# EAGLE board WeighingControl_Karbra_Silkscreen (EAGLE 9.6.2)
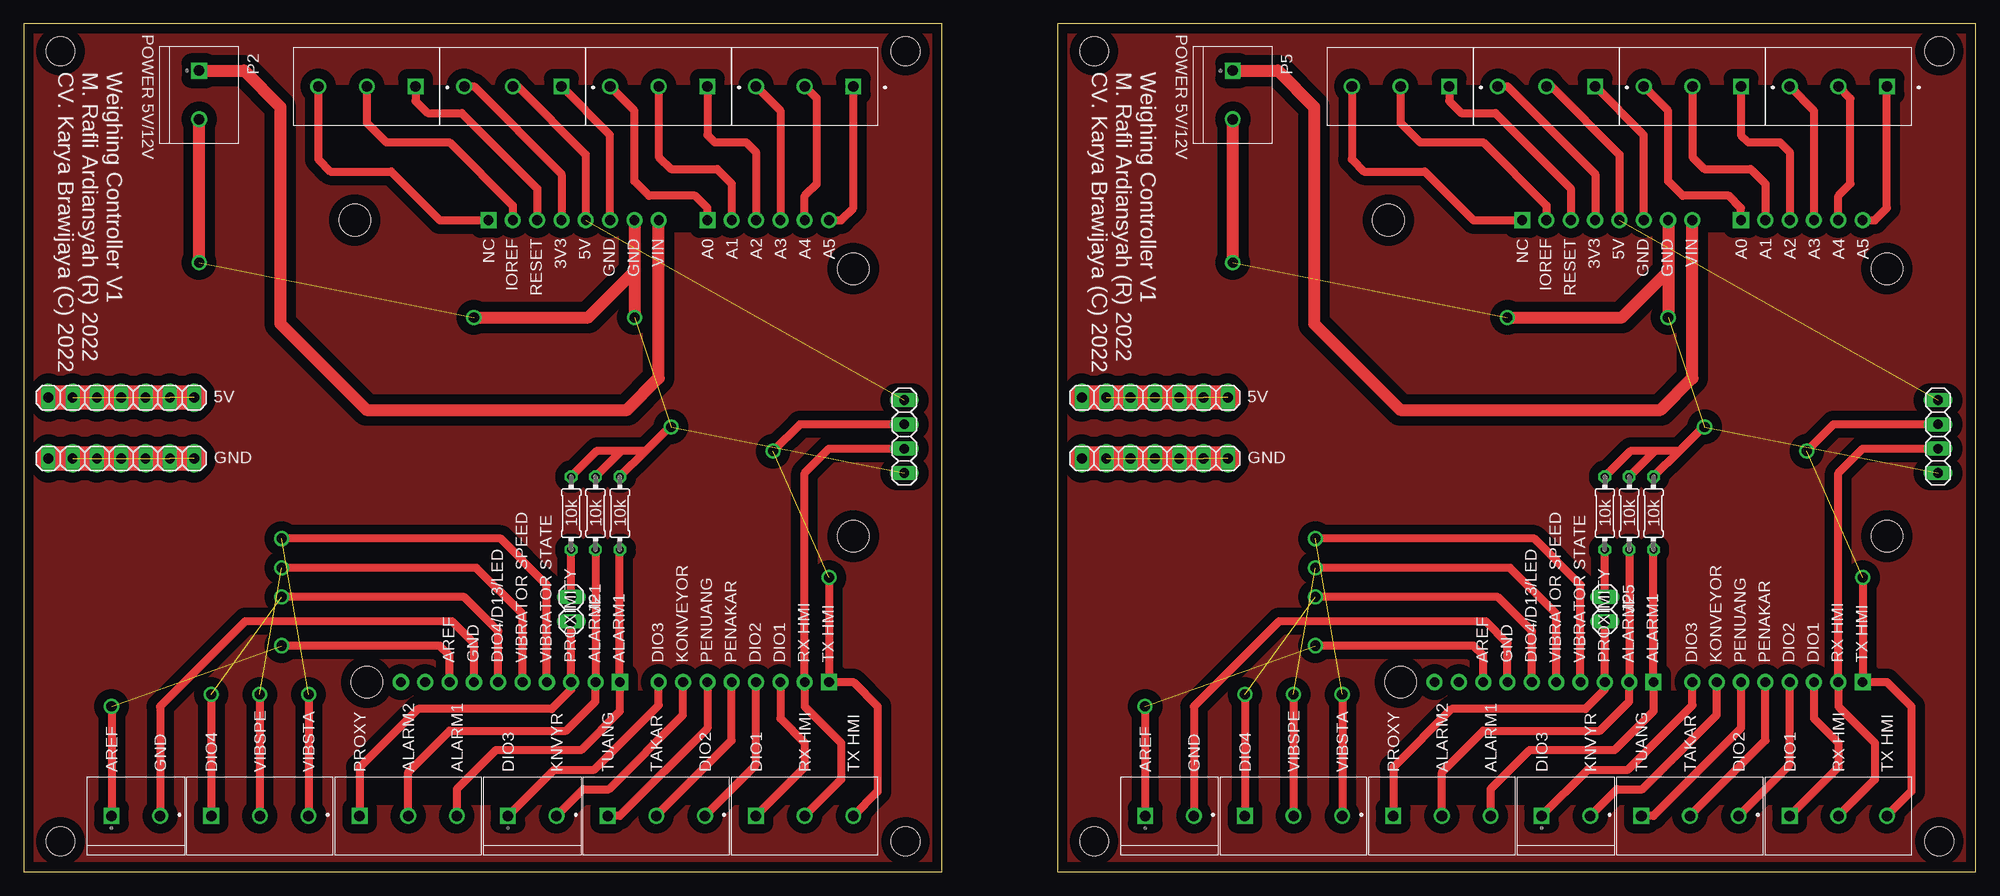
[diagram p0: board, top side]

Size 203.81 x 88.57 mm. Coordinates in mm from the lower left corner, seen from the top.
Outline: 0,0 95.86,0 95.86,88.57 0,88.57 0,0
Outline: 107.95,0 203.81,0 203.81,88.57 107.95,88.57 107.95,0
Copper layers (1*16): Top 0.035mm / dielectric 1.5mm / Bottom 0.035mm
Design rules "default *": minimum track width 6mil, minimum drill 0.35mm, track to track 1mm, track to pad 0.7mm, pad to pad 0.7mm, via to via 0.7mm, smd to smd 0.7mm, copper to edge 40mil, drill to drill 6mil, minimum pad ring 10mil, minimum via ring 8mil, stop-mask expansion 4mil, vias tented up to drill 0mil, thermal gap 10mil
Holes 3 mm at 3.81,3.17 3.81,85.72 92.08,3.17 92.08,85.72 111.76,3.17 111.76,85.72 200.03,3.17 200.03,85.72

## Footprints (pad centres in the part's own frame; a part is rotated, then mirrored left to right if it is on the bottom)
ARDUINO_A000066 = drill 1.016 pad 1.676: 3V3 35.56,2.54; 5V 38.1,2.54; A1 53.34,2.54; A2 55.88,2.54; A3 58.42,2.54; A4 60.96,2.54; A4(SDA) 21.336,50.8; A5 63.5,2.54; A5(SCL) 18.796,50.8; AREF 23.876,50.8; D1 60.96,50.8; D2 58.42,50.8; D3 55.88,50.8; D4 53.34,50.8; D5 50.8,50.8; D6 48.26,50.8; D7 45.72,50.8; D9 39.116,50.8; D10 36.576,50.8; D11 34.036,50.8; D12 31.496,50.8; D13 28.956,50.8; GND_1 43.18,2.54; GND_2 40.64,2.54; GND_3 26.416,50.8; IOREF 30.48,2.54; RST 33.02,2.54; VIN 45.72,2.54 | drill 1.016 pad 1.676 square: A0 50.8,2.54; D0 63.5,50.8; D8 41.656,50.8; P1 27.94,2.54 | hole 3.3: 66.04,35.56; 66.04,7.62; 15.24,50.8; 13.97,2.54
TE_282837-3 = drill 1.1 square: 1 -5.08,0 | drill 1.1: 2 0,0; 3 5.08,0
1X02 = drill 1.016 long: 1 -1.27,0; 2 1.27,0
1X04 = drill 1.016 long: 1 -3.81,0; 2 -1.27,0; 3 1.27,0; 4 3.81,0
1X07 = drill 1.016 long: 1 -7.62,0; 2 -5.08,0; 3 -2.54,0; 4 0,0; 5 2.54,0; 6 5.08,0; 7 7.62,0
TE_282837-2 = drill 1.1 square: 1 -2.54,0 | drill 1.1: 2 2.54,0
0204/7 = drill 0.813 octagon: 1 -3.81,0; 2 3.81,0

## Placement (x,y rotation side)
A1  A000066  [ARDUINO_A000066]  20.57,70.61 180 bottom
A2  A000066  [ARDUINO_A000066]  128.52,70.61 180 bottom
J1  282837-3  [TE_282837-3]  81.53,5.84 0 top
J2  282837-3  [TE_282837-3]  66.04,5.84 0 top
J3  282837-3  [TE_282837-3]  66.29,82.04 180 top
J4  282837-3  [TE_282837-3]  81.53,82.04 180 top
J5  282837-3  [TE_282837-3]  35.81,82.04 180 top
J6  282837-3  [TE_282837-3]  51.05,82.04 180 top
J7  282837-3  [TE_282837-3]  40.13,5.84 0 top
J8  282837-3  [TE_282837-3]  24.64,5.84 0 top
J9  282837-3  [TE_282837-3]  189.48,5.84 0 top
J10  282837-3  [TE_282837-3]  173.99,5.84 0 top
J11  282837-3  [TE_282837-3]  174.24,82.04 180 top
J12  282837-3  [TE_282837-3]  189.48,82.04 180 top
J13  282837-3  [TE_282837-3]  143.76,82.04 180 top
J14  282837-3  [TE_282837-3]  159,82.04 180 top
J15  282837-3  [TE_282837-3]  148.08,5.84 0 top
J16  282837-3  [TE_282837-3]  132.59,5.84 0 top
JP1  [1X02]  57.15,27.43 270 top
JP2  [1X04]  91.95,45.47 270 top
JP3  [1X07]  10.16,49.53 0 top
JP4  [1X07]  10.16,43.18 0 top
JP5  [1X02]  165.1,27.43 270 top
JP6  [1X04]  199.9,45.47 270 top
JP7  [1X07]  118.11,49.53 0 top
JP8  [1X07]  118.11,43.18 0 top
P1  282837-2  [TE_282837-2]  53.09,5.84 0 top
P2  282837-2  [TE_282837-2]  18.29,81.15 270 top
P3  282837-2  [TE_282837-2]  11.68,5.84 0 top
P4  282837-2  [TE_282837-2]  161.04,5.84 0 top
P5  282837-2  [TE_282837-2]  126.24,81.15 270 top
P6  282837-2  [TE_282837-2]  119.63,5.84 0 top
R1  [0204/7]  57.15,37.47 90 top
R2  [0204/7]  59.69,37.47 90 top
R3  [0204/7]  62.23,37.47 90 top
R4  [0204/7]  165.1,37.47 90 top
R5  [0204/7]  167.64,37.47 90 top
R6  [0204/7]  170.18,37.47 90 top

## Library data of the parts
A1 A2 = A000066; DESCRIPTION: A000066 | Arduino Uno Rev3 Arduino Corporation Embedded System Development Boards & Kits Microcontroller 16MHz - Arrow.com; DIGI-KEY_PART_NUMBER: 1050-1024-ND; MF: Arduino; MP: A000066; PACKAGE: Non-Standard Arduino; PURCHASE-URL: https://pricing.snapeda.com/search/part/A000066/?ref=eda
J1-J16 = 282837-3; AVAILABILITY: In Stock; COMMENT: 282837-3; DESCRIPTION: Wire to Board 3 Position 5.08 mm Pitch 30-16 AWG Euro Style Terminal Block; MF: TE Connectivity; MP: 282837-3; PACKAGE: None; PRICE: None; PURCHASE-URL: https://pricing.snapeda.com/search/part/282837-3/?ref=eda
JP1-JP8 = pinhead
P1-P6 = 282837-2; AVAILABILITY: In Stock; COMMENT: 282837-2; DESCRIPTION: Connector Terminal Blocks Receptacle 2 Position 5.08mm Solder Straight Thru-Hole 13.5A/Contact; EU_ROHS_COMPLIANCE: Compliant with Exemptions; MF: TE Connectivity; MP: 282837-2; PACKAGE: None; PRICE: None; PURCHASE-URL: https://pricing.snapeda.com/search/part/282837-2/?ref=eda
R1-R6 = rcl; SPICEPREFIX: R

## Nets
N$1: A1.A0 J3.3
N$2: A1.A1 J3.2
N$3: A1.A2 J3.1
N$4: A1.A3 J4.3
N$5: A1.A4 J4.2
N$6: A1.A5 J4.1
N$7: A1.D0 J1.3 JP2.2
N$8: A1.D1 J1.2 JP2.3
N$9: A1.D2 J1.1
N$10: A1.D3 J2.3
N$11: A1.D4 J2.2
N$12: A1.D5 J2.1
N$13: A1.D6 P1.2
N$14: A1.D7 P1.1
N$15: A1.P1 J5.3
N$16: A1.IOREF J5.2
N$17: A1.RST J5.1
N$18: A1.3V3 J6.3
N$19: A1.5V J6.2 JP2.1
N$20: A1.GND_1 JP2.4 P2.2 R1.2 R2.2 R3.2
N$21: A1.GND_2 J6.1
N$22: A1.VIN P2.1
N$23: A1.D8 J7.3 R3.1
N$24: A1.D9 J7.2 R2.1
N$25: JP1.1 R1.1
N$26: A1.D11 J8.3
N$27: A1.D12 J8.2
N$28: A1.D13 J8.1
N$29: A1.GND_3 P3.2
N$30: A1.AREF P3.1
N$31: JP3.1 JP3.2 JP3.3 JP3.4 JP3.5 JP3.6 JP3.7
N$32: JP4.1 JP4.2 JP4.3 JP4.4 JP4.5 JP4.6 JP4.7
N$33: A2.A0 J11.3
N$34: A1.D10 J7.1 JP1.2
N$35: A2.A1 J11.2
N$36: A2.A2 J11.1
N$37: A2.A3 J12.3
N$38: A2.A4 J12.2
N$39: A2.A5 J12.1
N$40: A2.D0 J9.3 JP6.2
N$41: A2.D1 J9.2 JP6.3
N$42: A2.D2 J9.1
N$43: A2.D3 J10.3
N$44: A2.D4 J10.2
N$45: A2.D5 J10.1
N$46: A2.D6 P4.2
N$47: A2.D7 P4.1
N$48: A2.P1 J13.3
N$49: A2.IOREF J13.2
N$50: A2.RST J13.1
N$51: A2.3V3 J14.3
N$52: A2.5V J14.2 JP6.1
N$53: A2.VIN P5.1
N$54: A2.D8 J15.3 R6.1
N$55: A2.D9 J15.2 R5.1
N$56: A2.D11 J16.3
N$57: A2.D12 J16.2
N$58: A2.D13 J16.1
N$59: A2.GND_3 P6.2
N$60: A2.AREF P6.1
N$61: A2.GND_1 JP6.4 P5.2 R4.2 R5.2 R6.2
N$62: A2.GND_2 J14.1
N$63: A2.D10 J15.1 JP5.2
N$64: JP5.1 R4.1
N$65: JP7.1 JP7.2 JP7.3 JP7.4 JP7.5 JP7.6 JP7.7
N$66: JP8.1 JP8.2 JP8.3 JP8.4 JP8.5 JP8.6 JP8.7

## Tracks (layer width: path | path; a pad name or v marks a point on that pad's centre or on a via)
KEEP0
  cutout Top: 26.92,34.67 49.91,34.67 54.61,29.97 54.61,23.11 54.48,22.99 26.92,22.99
KEEP1
  cutout Top: 35.05,7.11 87.25,7.11 89.03,8.89 89.03,17.02 87.25,18.8 42.8,18.8 36.32,12.32 35.05,11.05
KEEP2
  cutout Top: 86.61,82.04 30.73,82.04 30.73,74.55 32.13,73.15 38.23,73.15 44.45,66.93 83.06,66.93 86.61,70.48
KEEP3
  cutout Top: 134.87,34.67 157.86,34.67 162.56,29.97 162.56,23.11 162.43,22.99 134.87,22.99
KEEP4
  cutout Top: 143,7.11 195.2,7.11 196.98,8.89 196.98,17.02 195.2,18.8 150.75,18.8 144.27,12.32 143,11.05
KEEP5
  cutout Top: 194.56,82.04 138.68,82.04 138.68,74.55 140.08,73.15 146.18,73.15 152.4,66.93 191.01,66.93 194.56,70.48
MASKING_ATAS
  pour Top (isolate 1): 0,88.52 95.89,88.52 95.89,87.25 95.89,0 93.73,0 0,0 0,2.16
MASKING_ATAS1
  pour Top (isolate 1): 107.95,88.52 203.84,88.52 203.84,87.25 203.84,0 201.68,0 107.95,0 107.95,2.16
N$1
  Top 0.813: J3.3 63.75,79.5 63.75,72.14 65.28,70.61 70.1,70.61 71.37,69.34 A1.A0
N$2
  Top 0.813: J3.2 66.29,74.68 67.56,73.41 72.39,73.41 73.91,71.88 A1.A1
N$3
  Top 0.61: A1.A2 76.45,74.42
  Top 0.813: J3.1 71.37,76.96 72.14,76.2 75.44,76.2 76.45,75.18 A1.A2
N$4
  Top 0.813: J4.3 78.99,79.5 A1.A3
N$5
  Top 0.813: J4.2 82.8,80.77 82.8,71.88 81.53,70.61 A1.A4
N$6
  Top 0.813: A1.A5 85.34,68.07 86.61,69.34 J4.1
N$7  (via drill 1.05 pad 0.75)  (1 unrouted)
  Top 0.813: J1.3 89.15,8.38 89.15,17.27 86.61,19.81 A1.D0 v84.07,30.73 | JP2.2 81.03,46.74 v78.23,43.94
N$8
  Top 0.813: J1.2 85.34,9.65 85.34,13.46 81.53,17.27 A1.D1 81.53,41.66 84.07,44.2 JP2.3
N$9
  Top 0.813: J1.1 81.53,10.92 81.53,13.46 78.99,16 A1.D2
N$10
  Top 0.813: J2.3 76.45,11.18 A1.D3
N$11
  Top 0.813: A1.D4 73.91,13.72 J2.2
N$12
  Top 0.813: A1.D5 71.37,14.99 62.23,5.84 J2.1
N$13
  Top 0.813: P1.2 58.42,8.64 61.09,8.64 68.83,16.38 A1.D6
N$14
  Top 0.813: P1.1 55.37,10.67 59.56,10.67 66.29,17.4 A1.D7
N$15
  Top 0.813: J5.3 30.73,74.42 32,73.15 38.35,73.15 43.43,68.07 A1.P1
N$16
  Top 0.813: J5.2 35.81,78.23 37.85,76.2 44.45,76.2 51.05,69.6 A1.IOREF
N$17
  Top 0.813: J5.1 40.89,80.52 42.16,79.25 45.72,79.25 53.59,71.37 A1.RST
N$18
  Top 0.813: J6.3 46.99,82.04 56.13,72.9 A1.3V3
N$19  (1 unrouted)
  Top 0.813: J6.2 51.56,82.04 58.67,74.93 A1.5V
N$20  (via drill 1.05 pad 0.75)  (3 unrouted)
  Top 0.813: R3.2 64.96,44.01 | 64.96,44.01 67.44,46.48 v67.56,46.48 | 62.42,44.01 59.88,44.01 R1.2 | 62.42,44.01 64.96,44.01 | R2.2 62.42,44.01
  Top 1.27: A1.GND_1 63.75,62.74 | 63.75,62.74 v63.75,57.91 | 63.75,62.74 58.93,57.91 v46.99,57.91 | v18.29,63.63 P2.2
N$21
  Top 0.813: J6.1 61.21,76.96 A1.GND_2
N$22
  Top 1.27: A1.VIN 66.29,51.56 62.99,48.26 35.79,48.26 26.78,57.26 26.78,79.9 22.99,83.69 P2.1
N$23
  Top 0.813: R3.1 A1.D8 62.23,16.76 58.17,12.7 49.28,12.7 45.21,8.64 J7.3
N$24
  Top 0.813: R2.1 A1.D9 59.69,17.78 56.64,14.73 44.45,14.73 40.13,10.41 J7.2
N$25
  Top 0.813: JP1.1 R1.1
N$26  (via drill 1.05 pad 0.75)  (1 unrouted)
  Top 0.813: v29.72,18.54 J8.3 | A1.D11 54.61,29.97 49.78,34.8 v26.92,34.8
N$27  (via drill 1.05 pad 0.75)  (1 unrouted)
  Top 0.813: v24.64,18.54 J8.2 | A1.D12 52.07,26.92 47.24,31.75 v26.92,31.75
N$28  (via drill 1.05 pad 0.75)  (1 unrouted)
  Top 0.813: A1.D13 49.53,25.15 45.97,28.7 v26.92,28.7 | v19.56,18.54 J8.1
N$29
  Top 0.813: A1.GND_3 46.99,23.88 44.7,26.16 23.11,26.16 14.22,17.27 P3.2
N$30  (via drill 1.05 pad 0.75)  (1 unrouted)
  Top 0.813: A1.AREF 44.45,22.61 43.43,23.62 v26.92,23.62 | v9.14,17.27 P3.1
N$31  (5 unrouted)
  Top 2.54: JP3.1 JP3.7
N$32  (5 unrouted)
  Top 2.54: JP4.1 JP4.7
N$33
  Top 0.813: J11.3 171.7,79.5 171.7,72.14 173.23,70.61 178.05,70.61 179.32,69.34 A2.A0
N$34
  Top 0.813: J7.1 35.05,10.92 41.15,17.02 55.12,17.02 57.15,19.05 A1.D10 JP1.2
N$35
  Top 0.813: J11.2 174.24,74.68 175.51,73.41 180.34,73.41 181.86,71.88 A2.A1
N$36
  Top 0.61: A2.A2 184.4,74.42
  Top 0.813: J11.1 179.32,76.96 180.09,76.2 183.39,76.2 184.4,75.18 A2.A2
N$37
  Top 0.813: J12.3 186.94,79.5 A2.A3
N$38
  Top 0.813: J12.2 190.75,80.77 190.75,71.88 189.48,70.61 A2.A4
N$39
  Top 0.813: A2.A5 193.29,68.07 194.56,69.34 J12.1
N$40  (via drill 1.05 pad 0.75)  (1 unrouted)
  Top 0.813: J9.3 197.1,8.38 197.1,17.27 194.56,19.81 A2.D0 v192.02,30.73 | JP6.2 188.98,46.74 v186.18,43.94
N$41
  Top 0.813: J9.2 193.29,9.65 193.29,13.46 189.48,17.27 A2.D1 189.48,41.66 192.02,44.2 JP6.3
N$42
  Top 0.813: J9.1 189.48,10.92 189.48,13.46 186.94,16 A2.D2
N$43
  Top 0.813: J10.3 184.4,11.18 A2.D3
N$44
  Top 0.813: A2.D4 181.86,13.72 J10.2
N$45
  Top 0.813: A2.D5 179.32,14.99 170.18,5.84 J10.1
N$46
  Top 0.813: P4.2 166.37,8.64 169.04,8.64 176.78,16.38 A2.D6
N$47
  Top 0.813: P4.1 163.32,10.67 167.51,10.67 174.24,17.4 A2.D7
N$48
  Top 0.813: J13.3 138.68,74.42 139.95,73.15 146.3,73.15 151.38,68.07 A2.P1
N$49
  Top 0.813: J13.2 143.76,78.23 145.8,76.2 152.4,76.2 159,69.6 A2.IOREF
N$50
  Top 0.813: J13.1 148.84,80.52 150.11,79.25 153.67,79.25 161.54,71.37 A2.RST
N$51
  Top 0.813: J14.3 154.94,82.04 164.08,72.9 A2.3V3
N$52  (1 unrouted)
  Top 0.813: J14.2 159.51,82.04 166.62,74.93 A2.5V
N$53
  Top 1.27: A2.VIN 174.24,51.56 170.94,48.26 143.74,48.26 134.73,57.26 134.73,79.9 130.94,83.69 P5.1
N$54
  Top 0.813: R6.1 A2.D8 170.18,16.76 166.12,12.7 157.23,12.7 153.16,8.64 J15.3
N$55
  Top 0.813: R5.1 A2.D9 167.64,17.78 164.59,14.73 152.4,14.73 148.08,10.41 J15.2
N$56  (via drill 1.05 pad 0.75)  (1 unrouted)
  Top 0.813: v137.67,18.54 J16.3 | A2.D11 162.56,29.97 157.73,34.8 v134.87,34.8
N$57  (via drill 1.05 pad 0.75)  (1 unrouted)
  Top 0.813: v132.59,18.54 J16.2 | A2.D12 160.02,26.92 155.19,31.75 v134.87,31.75
N$58  (via drill 1.05 pad 0.75)  (1 unrouted)
  Top 0.813: A2.D13 157.48,25.15 153.92,28.7 v134.87,28.7 | v127.51,18.54 J16.1
N$59
  Top 0.813: A2.GND_3 154.94,23.88 152.65,26.16 131.06,26.16 122.17,17.27 P6.2
N$60  (via drill 1.05 pad 0.75)  (1 unrouted)
  Top 0.813: A2.AREF 152.4,22.61 151.38,23.62 v134.87,23.62 | v117.09,17.27 P6.1
N$61  (via drill 1.05 pad 0.75)  (3 unrouted)
  Top 0.813: R6.2 172.91,44.01 | 172.91,44.01 175.39,46.48 v175.51,46.48 | 170.37,44.01 167.83,44.01 R4.2 | 170.37,44.01 172.91,44.01 | R5.2 170.37,44.01
  Top 1.27: A2.GND_1 171.7,62.74 | 171.7,62.74 v171.7,57.91 | 171.7,62.74 166.88,57.91 v154.94,57.91 | v126.24,63.63 P5.2
N$62
  Top 0.813: J14.1 169.16,76.96 A2.GND_2
N$63
  Top 0.813: J15.1 143,10.92 149.1,17.02 163.07,17.02 165.1,19.05 A2.D10 JP5.2
N$64
  Top 0.813: JP5.1 R4.1
N$65  (5 unrouted)
  Top 2.54: JP7.1 JP7.7
N$66  (5 unrouted)
  Top 2.54: JP8.1 JP8.7

## Text on the board
tNames: POWER 5V/12V | POWER 5V/12V | CV. Karya Brawijaya (C) 2022 | M. Rafli Ardiansyah (R) 2022 | Weighing Controller V1 | CV. Karya Brawijaya (C) 2022 | M. Rafli Ardiansyah (R) 2022 | Weighing Controller V1 | NC | IOREF | RESET | 3V3 | 5V | GND | GND | VIN | A0 | A1 | A2 | A3 | A4 | A5 | NC | IOREF | RESET | 3V3 | 5V | GND | GND | VIN | A0 | A1 | A2 | A3 | A4 | A5 | 5V | 5V | GND | GND | 10k | 10k | 10k | 10k | 10k | 10k | AREF | GND | DIO4/D13/LED | VIBRATOR SPEED | VIBRATOR STATE | PROXIMITY | ALARM2 | ALARM1 | DIO3 | KONVEYOR | PENUANG | PENAKAR | DIO2 | DIO1 | RX HMI | TX HMI | AREF | GND | DIO4/D13/LED | VIBRATOR SPEED | VIBRATOR STATE | PROXIMITY | ALARM2 | ALARM1 | DIO3 | KONVEYOR | PENUANG | PENAKAR | DIO2 | DIO1 | RX HMI | TX HMI | AREF | GND | DIO4 | VIBSPE | VIBSTA | PROXY | ALARM2 | ALARM1 | DIO3 | KNVYR | TUANG | TAKAR | DIO2 | DIO1 | RX HMI | TX HMI | AREF | GND | DIO4 | VIBSPE | VIBSTA | PROXY | ALARM2 | ALARM1 | DIO3 | KNVYR | TUANG | TAKAR | DIO2 | DIO1 | RX HMI | TX HMI